# EAGLE board headstage-neuropix (EAGLE 8.3.2), part 1 of 2
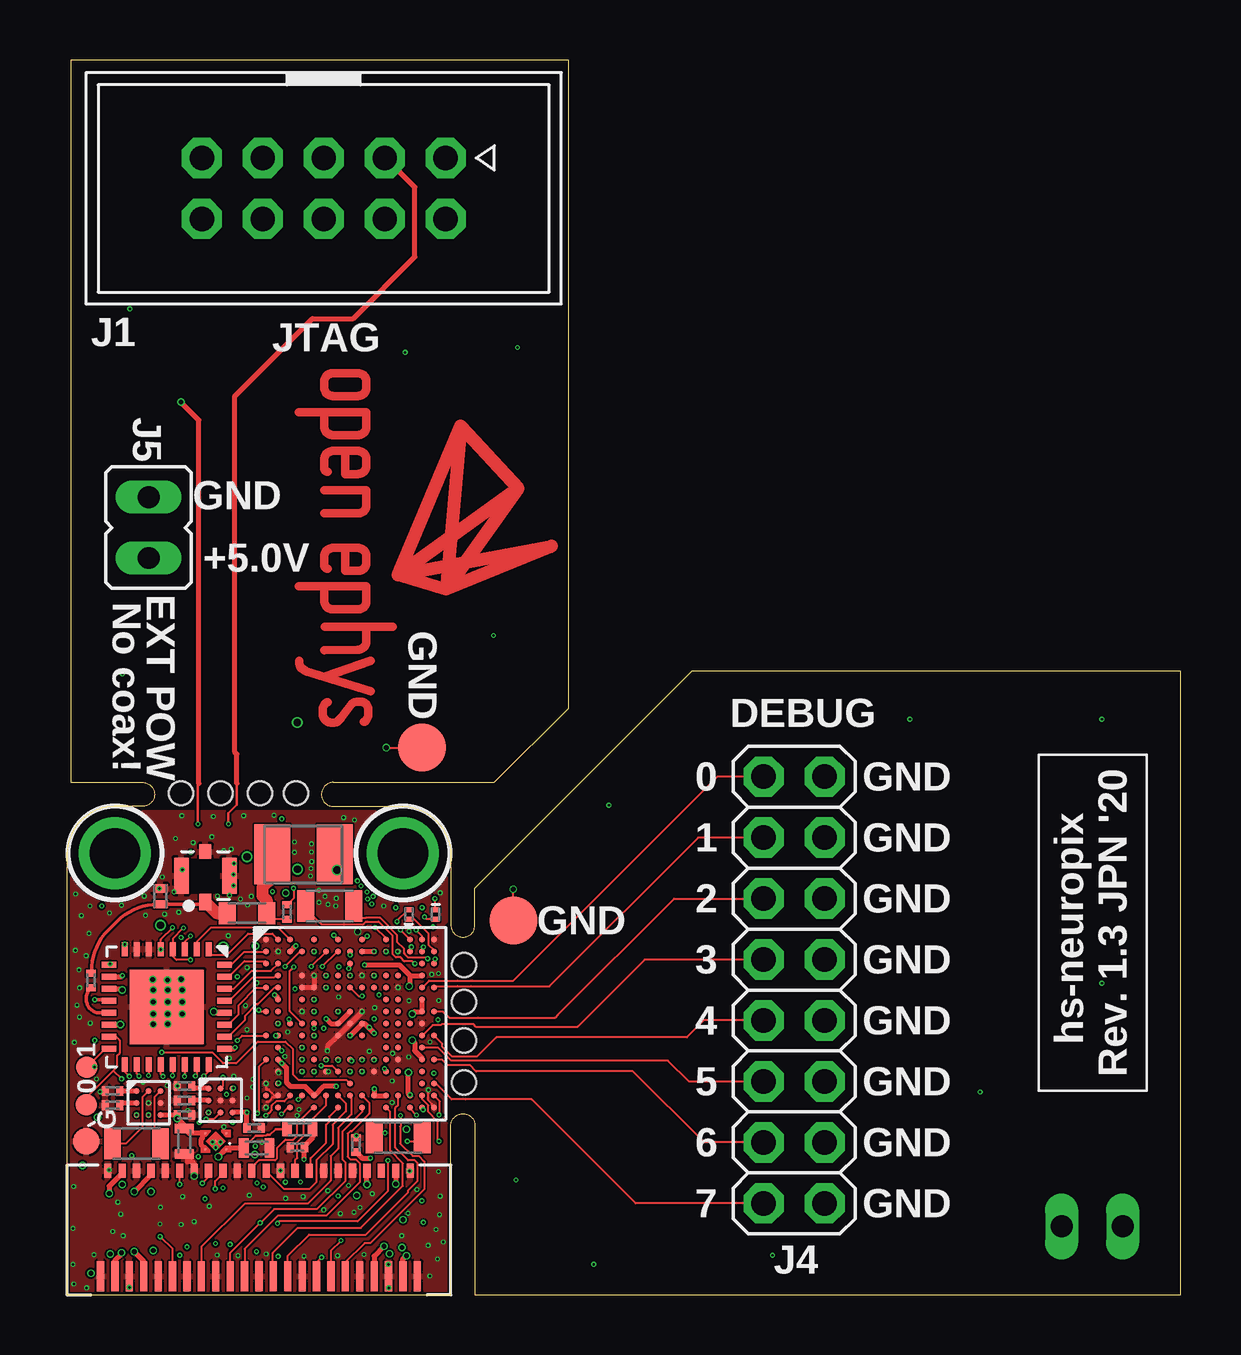
[diagram p0: board, top side]
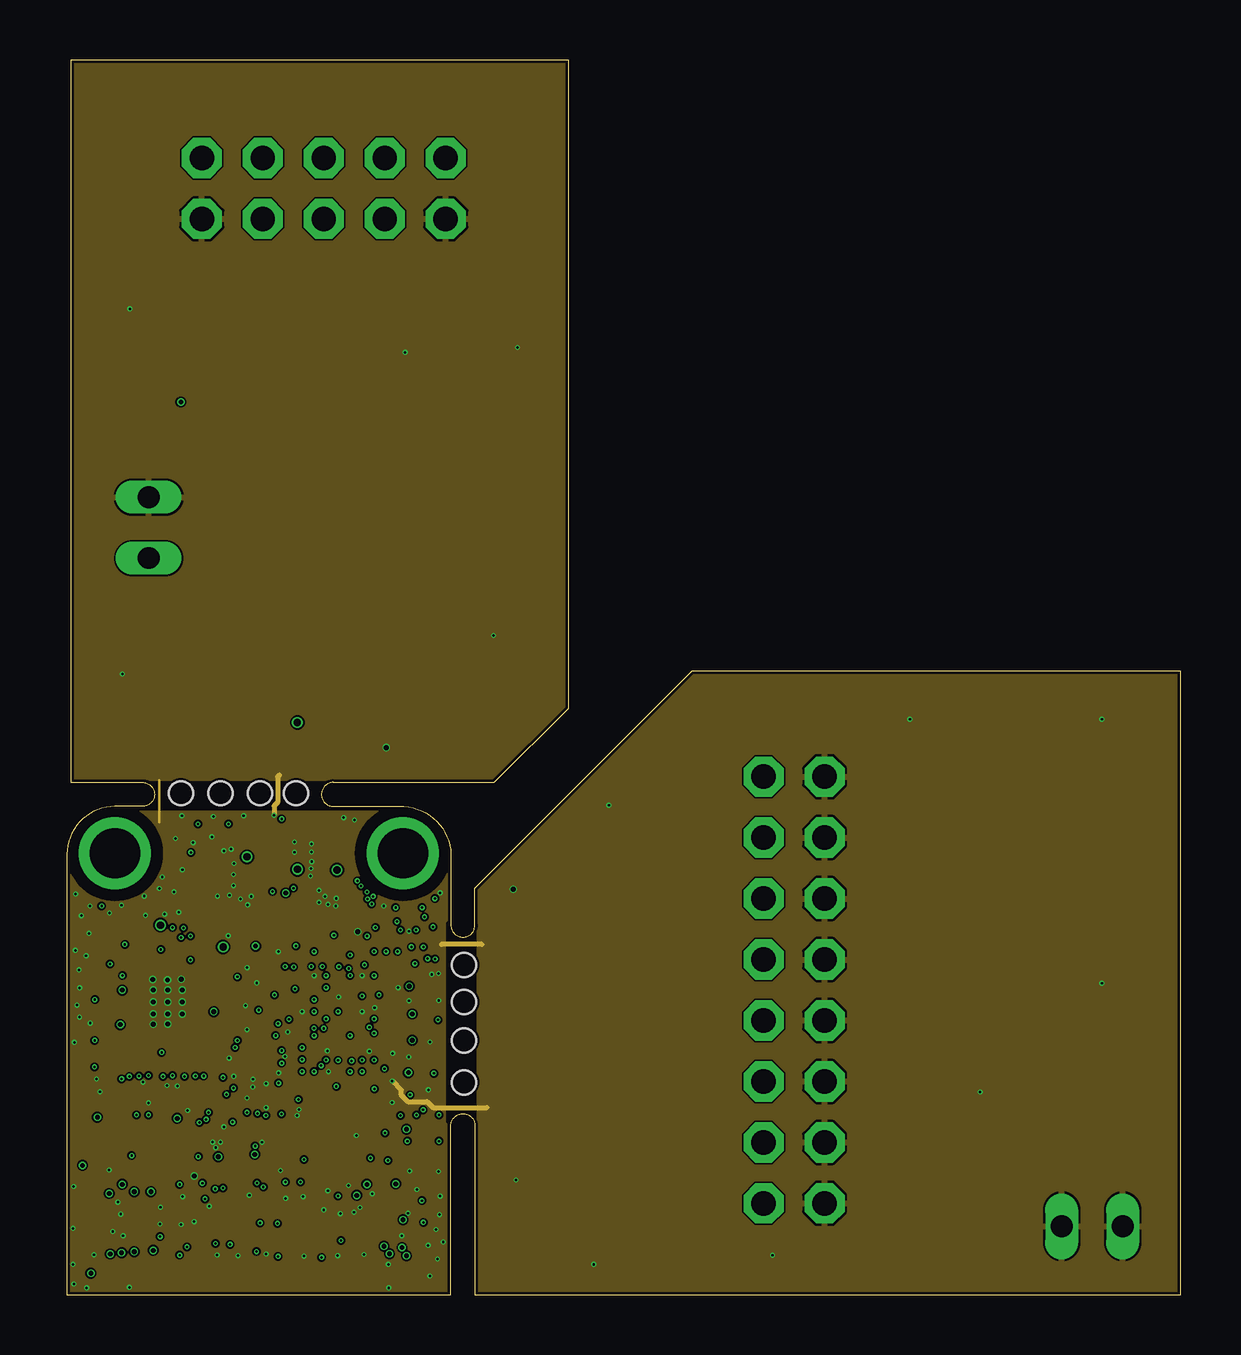
[diagram p1: board, inner layer GND1]
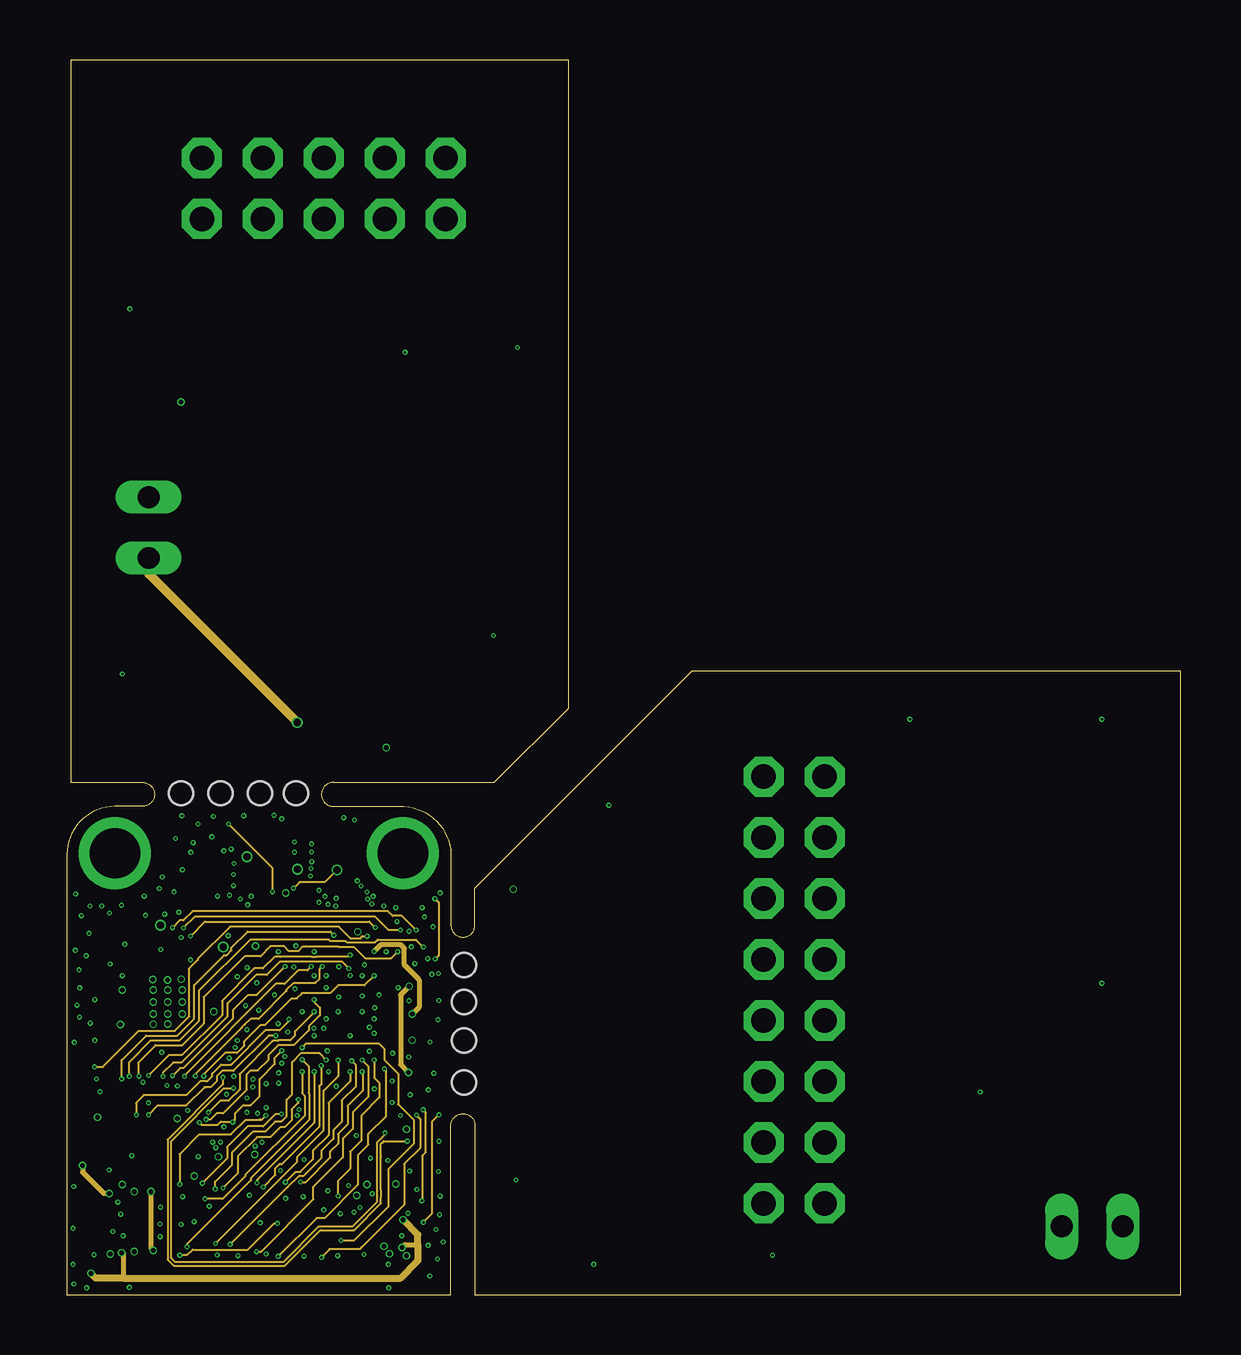
[diagram p2: board, inner layer Highspeed2]
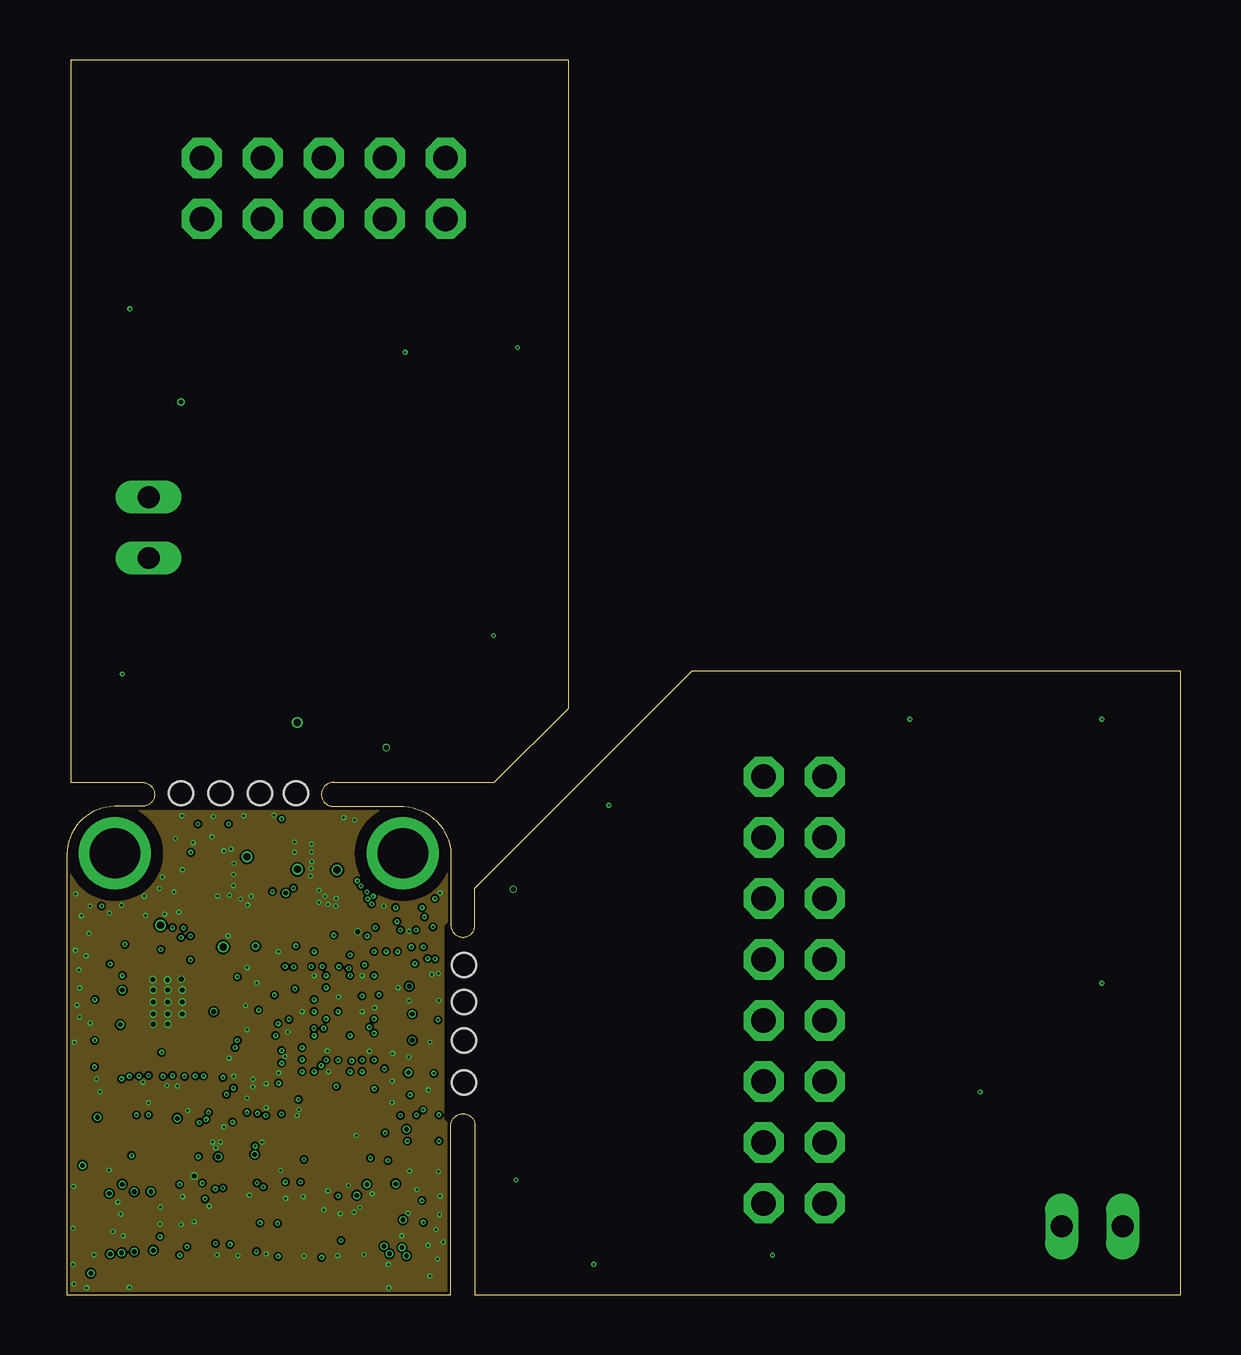
[diagram p3: board, inner layer GND2]
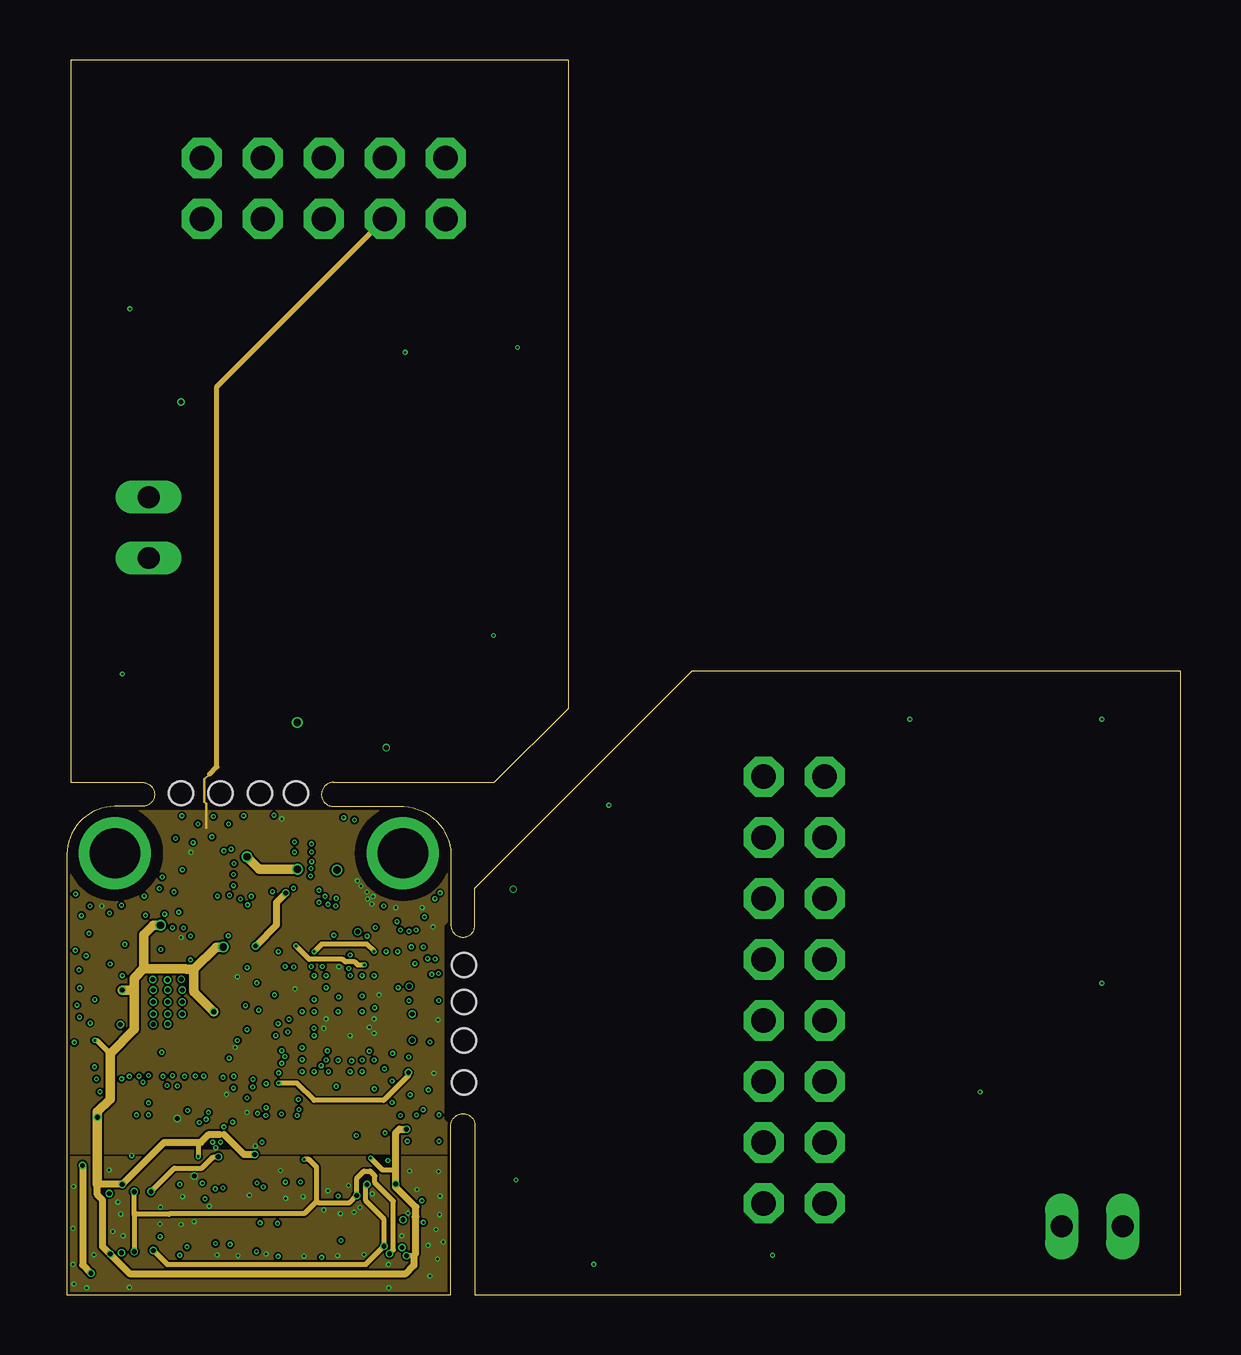
[diagram p4: board, inner layer VCC]
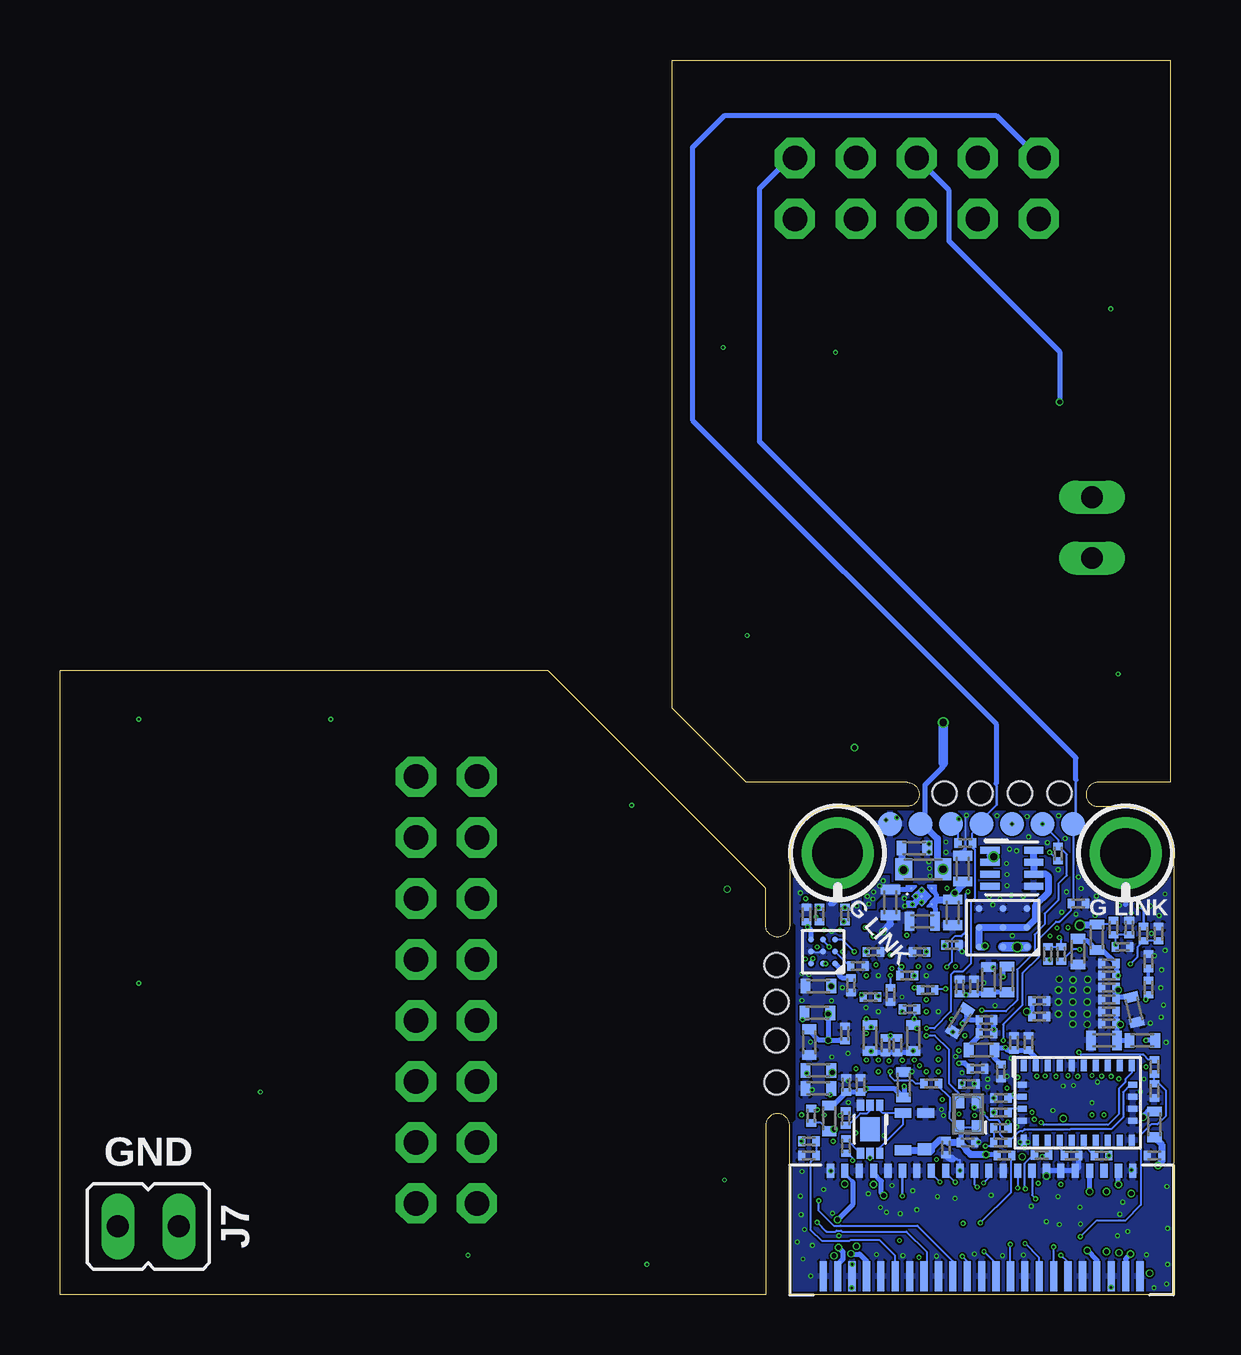
[diagram p5: board, bottom side, seen from below]

Size 46.4 x 51.45 mm. Coordinates in mm from the lower left corner, seen from the top.
Outline: 0.15,51.45 0.15,21.35 3.15,21.35 arc-90 3.65,20.85 arc-90 3.15,20.35 2,20.35 arc90 0,18.35 0,0 16,0 16,7.05 arc-90 16.5,7.55 arc-90 17,7.05 17,0 46.4,0 46.4,26 26.05,26 17,16.95 17,15.4 arc-90 16.5,14.9 arc-90 16,15.4 16,18.35 arc90 13.85,20.35 11.1,20.35 arc-90 10.6,20.85 arc-90 11.1,21.35 17.8,21.35 20.9,24.45 20.9,51.45 0.15,51.45
Copper layers (1*2*3+4*5*16): Highspeed1 0.036mm / dielectric 4mil / GND1 0.036mm / dielectric 5mil / Highspeed2 0.036mm / dielectric 0.10921875mm / GND2 0.036mm / dielectric 5mil / VCC 0.036mm / dielectric 4mil / LowSpeed 0.036mm
Design rules "speedy-6-layer-3mil-trace-space": minimum track width 3mil, minimum drill 3mil, track to track 3mil, track to pad 3mil, pad to pad 3mil, via to via 3mil, smd to smd 2mil, copper to edge 5mil, drill to drill 5mil, minimum pad ring 2mil, minimum via ring 2mil, stop-mask expansion 1mil, vias tented up to drill 1mm, thermal gap 0.1mm
Net classes: 1 diff: width 0.09 mm, drill 0.2 mm, clearance 0.09 mm
Holes 1 mm at 8.05,20.9 16.55,12.2 16.55,10.6 16.55,8.85 16.55,13.75 4.75,20.9 6.4,20.9 9.55,20.9
tKeepout: area 12,16.4 to 16,20.4; area 0,16.4 to 4,20.4
bKeepout: area 11.9,16.3 to 16.1,20.5; area -0.1,16.3 to 4.1,20.5
tRestrict: area -0.1,16.3 to 4.1,20.5; area 11.9,16.3 to 16.1,20.5
bRestrict: area -0.1,16.3 to 4.1,20.5; area 11.9,16.3 to 16.1,20.5
vRestrict: area 11.9,16.3 to 16.1,20.5

## Footprints (pad centres in the part's own frame; a part is rotated, then mirrored left to right if it is on the bottom)
0201T = smd 0.3 x 0.4: 1 -0.3,0; 2 0.3,0
0402T = smd 0.4 x 0.6: 1 -0.533,0; 2 0.533,0
0402TW = smd 0.4 x 0.8: 1 -0.533,0; 2 0.533,0
LED-0201T = smd 0.2 x 0.35: 1 -0.2,0; 2 0.2,0
0402T-DFN = smd 0.35 x 0.6: A -0.325,0; C 0.325,0
0805PT-NOSILK = smd 0.7 x 1.3: A -1,0; C 1,0
2X05_IDC = drill 1.016 pad 1.676 octagon: 1 -5.08,-1.27; 2 -5.08,1.27; 3 -2.54,-1.27; 4 -2.54,1.27; 5 0,-1.27; 6 0,1.27; 7 2.54,-1.27; 8 2.54,1.27; 9 5.08,-1.27; 10 5.08,1.27
X_FL_R_SMT_1(02) = smd 0.5 x 0.7: P$1 0,-1.1 | smd 0.6 x 1.5: P$2 -1,0; P$4 1,0 | smd 0.5 x 0.6: P$3 0,1
FH23-45S-0.3SHW(05) = smd 0.3 x 1.25: 1 -6.6,0.068; 3 -6,0.068; 5 -5.4,0.068; 7 -4.8,0.068; 9 -4.2,0.068; 11 -3.6,0.068; 13 -3,0.068; 15 -2.4,0.068; 17 -1.8,0.068; 19 -1.2,0.068; 21 -0.6,0.068; 23 0,0.068; 25 0.6,0.068; 27 1.2,0.068; 29 1.8,0.068; 31 2.4,0.068; 33 3,0.068; 35 3.6,0.068; 37 4.2,0.068; 39 4.8,0.068; 41 5.4,0.068; 43 6,0.068; 45 6.6,0.068 | smd 0.3 x 0.6: 2 -6.3,4.468; 4 -5.7,4.468; 6 -5.1,4.468; 8 -4.5,4.468; 10 -3.9,4.468; 12 -3.3,4.468; 14 -2.7,4.468; 16 -2.1,4.468; 18 -1.5,4.468; 20 -0.9,4.468; 22 -0.3,4.468; 24 0.3,4.468; 26 0.9,4.468; 28 1.5,4.468; 30 2.1,4.468; 32 2.7,4.468; 34 3.3,4.468; 36 3.9,4.468; 38 4.5,4.468; 40 5.1,4.468; 42 5.7,4.468; 44 6.3,4.468
2X08-BIG = drill 1.016 pad 1.676 octagon: 1 -8.89,-1.17; 2 -8.89,1.37; 3 -6.35,-1.17; 4 -6.35,1.37; 5 -3.81,-1.17; 6 -3.81,1.37; 7 -1.27,-1.17; 8 -1.27,1.37; 9 1.27,-1.17; 10 1.27,1.37; 11 3.81,-1.17; 12 3.81,1.37; 13 6.35,-1.17; 14 6.35,1.37; 15 8.89,-1.17; 16 8.89,1.37
JP2 = drill 0.914 long: 1 0,0; 2 2.54,0
0603T = smd 0.7 x 0.9: 1 -0.82,0; 2 0.82,0
1210T = smd 1.5 x 2.5: 1 -1.3,0; 2 1.3,0
TP10R = smd 1 x 1: TP 0,0
TP11R = smd 1.1 x 1.1: TP 0,0
TP09R = smd 0.9 x 0.9: TP 0,0
TP20R = smd 2 x 2: TP 0,0
MBGA153-8X8 = smd 0.25 x 0.25: A1 -3.5,3.5; A2 -3,3.5; A3 -2.5,3.5; A5 -1.5,3.5; A7 -0.5,3.5; A9 0.5,3.5; A11 1.5,3.5; A13 2.5,3.5; A14 3,3.5; A15 3.5,3.5; B1 -3.5,3; B2 -3,3; B3 -2.5,3; B4 -2,3; B5 -1.5,3; B6 -1,3; B7 -0.5,3; B8 0,3; B9 0.5,3; B10 1,3; B11 1.5,3; B12 2,3; B13 2.5,3; B14 3,3; B15 3.5,3; C1 -3.5,2.5; C2 -3,2.5; C8 0,2.5; C14 3,2.5; C15 3.5,2.5; D2 -3,2; D4 -2,2; D5 -1.5,2; D6 -1,2; D7 -0.5,2; D8 0,2; D9 0.5,2; D10 1,2; D11 1.5,2; D12 2,2; D14 3,2; E1 -3.5,1.5; E2 -3,1.5; E4 -2,1.5; E5 -1.5,1.5; E6 -1,1.5; E7 -0.5,1.5; E8 0,1.5; E9 0.5,1.5; E10 1,1.5; E11 1.5,1.5; E12 2,1.5; E14 3,1.5; E15 3.5,1.5; F2 -3,1; F4 -2,1; F5 -1.5,1; F11 1.5,1; F12 2,1; F14 3,1; G1 -3.5,0.5; G2 -3,0.5; G4 -2,0.5; G5 -1.5,0.5; G7 -0.5,0.5; G8 0,0.5; G9 0.5,0.5; G11 1.5,0.5; G12 2,0.5; G14 3,0.5; G15 3.5,0.5; H2 -3,0; H3 -2.5,0; H4 -2,0; H5 -1.5,0; H7 -0.5,0; H8 0,0; H9 0.5,0; H11 1.5,0; H12 2,0; H13 2.5,0; H14 3,0; J1 -3.5,-0.5; J2 -3,-0.5; J4 -2,-0.5; J5 -1.5,-0.5; J7 -0.5,-0.5; J8 0,-0.5; J9 0.5,-0.5; J11 1.5,-0.5; J12 2,-0.5; J14 3,-0.5; J15 3.5,-0.5; K2 -3,-1; K4 -2,-1; K5 -1.5,-1; K11 1.5,-1; K12 2,-1; K14 3,-1; L1 -3.5,-1.5; L2 -3,-1.5; L4 -2,-1.5; L5 -1.5,-1.5; L6 -1,-1.5; L7 -0.5,-1.5; L8 0,-1.5; L9 0.5,-1.5; L10 1,-1.5; L11 1.5,-1.5; L12 2,-1.5; L14 3,-1.5; L15 3.5,-1.5; M2 -3,-2; M4 -2,-2; M5 -1.5,-2; M6 -1,-2; M7 -0.5,-2; M8 0,-2; M9 0.5,-2; M10 1,-2; M11 1.5,-2; M12 2,-2; M14 3,-2; N1 -3.5,-2.5; N2 -3,-2.5; N8 0,-2.5; N14 3,-2.5; N15 3.5,-2.5; P1 -3.5,-3; P2 -3,-3; P3 -2.5,-3; P4 -2,-3; P5 -1.5,-3; P6 -1,-3; P7 -0.5,-3; P8 0,-3; P9 0.5,-3; P10 1,-3; P11 1.5,-3; P12 2,-3; P13 2.5,-3; P14 3,-3; P15 3.5,-3; R1 -3.5,-3.5; R2 -3,-3.5; R3 -2.5,-3.5; R5 -1.5,-3.5; R7 -0.5,-3.5; R9 0.5,-3.5; R11 1.5,-3.5; R13 2.5,-3.5; R14 3,-3.5; R15 3.5,-3.5
ASCO = smd 0.6 x 0.5: 1 -0.55,-0.4; 2 0.55,-0.4; 3 0.55,0.4; 4 -0.55,0.4
UDFN8-2X2 = smd 0.8 x 0.3: 1 -0.91,0.75; 2 -0.91,0.25; 3 -0.91,-0.25; 4 -0.91,-0.75; 5 0.91,-0.75; 6 0.91,-0.25; 7 0.91,0.25; 8 0.91,0.75
WQFN32-5X5 = smd 0.25 x 0.6: 1 1.75,2.4; 2 1.25,2.4; 3 0.75,2.4; 4 0.25,2.4; 5 -0.25,2.4; 6 -0.75,2.4; 7 -1.25,2.4; 8 -1.75,2.4; 17 -1.75,-2.4; 18 -1.25,-2.4; 19 -0.75,-2.4; 20 -0.25,-2.4; 21 0.25,-2.4; 22 0.75,-2.4; 23 1.25,-2.4; 24 1.75,-2.4 | smd 0.6 x 0.25: 9 -2.4,1.75; 10 -2.4,1.25; 11 -2.4,0.75; 12 -2.4,0.25; 13 -2.4,-0.25; 14 -2.4,-0.75; 15 -2.4,-1.25; 16 -2.4,-1.75; 25 2.4,-1.75; 26 2.4,-1.25; 27 2.4,-0.75; 28 2.4,-0.25; 29 2.4,0.25; 30 2.4,0.75; 31 2.4,1.25; 32 2.4,1.75 | smd 3.1 x 3.1: PAD 0,0
X2SON = smd 0.1 x 0.1: 1 -0.43,0.33; 2 -0.43,-0.33; 3 0.43,-0.33; 4 0.43,0.33 | smd 0.1 x 0.1 rotated 45: PAD 0,0
MICROSIP9-3X2.3 = smd 0.3 x 0.3: A1 -1,0.8; A2 0,0.8; A3 1,0.8; B1 -1,0; B2 0,0; B3 1,0; C1 -1,-0.8; C2 0,-0.8; C3 1,-0.8
LGA-28-3.8X5.2 = smd 0.25 x 0.475: 1 -2.25,1.56; 6 -2.25,-1.56; 7 -1.75,-1.56; 8 -1.25,-1.56; 9 -0.75,-1.56; 10 -0.25,-1.56; 11 0.25,-1.56; 12 0.75,-1.56; 13 1.25,-1.56; 14 1.75,-1.56; 15 2.25,-1.56; 20 2.25,1.56; 21 1.75,1.56; 22 1.25,1.56; 23 0.75,1.56; 24 0.25,1.56; 25 -0.25,1.56; 26 -0.75,1.56; 27 -1.25,1.56; 28 -1.75,1.56 | smd 0.375 x 0.25: 2 -2.3,0.75; 3 -2.3,0.25; 4 -2.3,-0.25; 5 -2.3,-0.75; 16 2.3,-0.75; 17 2.3,-0.25; 18 2.3,0.25; 19 2.3,0.75
VFLGA4-2.0X1.6 = smd 0.5 x 0.57: 1 -0.725,-0.425 | smd 0.4 x 0.7: 2 0.775,-0.475; 3 0.775,0.475; 4 -0.775,0.475
DFN6_2X1.3_PAD = smd 0.45 x 0.3: 1 -1,0.4; 2 -1,0; 3 -1,-0.4; 4 1,-0.4; 5 1,0; 6 1,0.4 | smd 1 x 0.8: PAD 0,0
WLCSP3X3 = smd 0.25 x 0.25: A1 -0.5,0.5; A2 0,0.5; A3 0.5,0.5; B1 -0.5,0; B2 0,0; B3 0.5,0; C1 -0.5,-0.5; C2 0,-0.5; C3 0.5,-0.5

## Placement (x,y rotation side)
C1  22nF  [0201T]  9.24,14.58 0 bottom
C2  22nF  [0201T]  11.5,10.4 270 bottom
C3  0.1uF  [0201T]  8.53,8.78 0 bottom
C4  0.1uF  [0201T]  12,10.4 270 bottom
C5  4.7uF  [0402T]  14.8,12.86 180 bottom
C6  4.7uF  [0402T]  12.65,10.7 270 bottom
C7  10uF  [0402T]  14.8,8.6 180 bottom
C8  10uF  [0402T]  10.85,10.7 270 bottom
C9  22nF  [0201T]  8.17,9.42 0 bottom
C10  22nF  [0201T]  13.7,10.89 90 bottom
C11  10nF  [0201T]  8.58,6.34 180 bottom
C12  22nF  [0201T]  8.32,12.85 90 bottom
C13  22nF  [0201T]  7.8,11.45 0 bottom
C14  22nF  [0201T]  13.64,8.75 90 bottom
C15  22nF  [0201T]  12.51,14.29 0 bottom
C16  0.1uF  [0201T]  8.91,12.84 90 bottom
C17  0.1uF  [0201T]  7.8,10.9 0 bottom
C18  0.1uF  [0201T]  13.05,8.75 90 bottom
C19  0.1uF  [0201T]  10.58,14.29 180 bottom
C20  10uF  [0402T]  8.9,11.42 238.2 bottom
C21  10uF  [0402T]  11.25,8.75 90 bottom
C22  10uF  [0402T]  15.18,10.53 270 bottom
C23  10uF  [0402T]  7.71,13.13 90 bottom
C24  0.1uF  [0201T]  7.2,8.2 180 bottom
C25  10uF  [0402TW]  9.2,15.93 270 bottom
C26  0.1uF  [0201T]  6.05,10.5 90 bottom
C27  10uF  [0402TW]  8.78,17.76 90 bottom
C28  0.1uF  [0201T]  5.6,12.25 0 bottom
C29  0.1uF  [0201T]  7.2,9.3 270 bottom
C30  10nF  [0201T]  5.6,11.6 0 bottom
C31  10nF  [0201T]  6.65,10.5 90 bottom
C32  10uF  [0402TW]  10.47,15.56 180 bottom
C33  10uF  [0402TW]  4.89,6.4 270 top
C34  0.1uF  [0201T]  4.25,5.8 180 bottom
C35  10nF  [0201T]  2.7,13.8 180 bottom
C36  10nF  [0201T]  2.7,12.8 180 bottom
C37  10nF  [0201T]  2.7,11.8 180 bottom
C38  0.1uF  [0201T]  2.7,13.3 180 bottom
C39  0.1uF  [0201T]  2.7,12.3 180 bottom
C40  0.1uF  [0201T]  2.7,11.3 180 bottom
C41  10uF  [0402TW]  11.8,16.35 270 bottom
C42  10uF  [0402TW]  7.9,6.12 0 top
C43  0.1uF  [0201T]  1,13.1 270 top
C44  47nF  [0201T]  1.05,12.8 270 bottom
C45  4.7uF  [0402T]  3.98,14.3 270 bottom
C46  10uF  [0402T]  1.65,11.88 283 bottom
C47  10uF  [0402TW]  2.9,10.6 180 bottom
C48  1uF  [0201T]  0.63,15.05 90 bottom
C49  10nF  [0201T]  9.48,6.13 90 bottom
C50  0.1uF  [0201T]  2.13,14.5 0 bottom
C51  10uF  [0402T]  10.8,18.61 0 bottom
C52  10nF  [0201T]  12.05,6.25 270 top
C53  1uF  [0201T]  1.9,8.5 180 top
C54  1uF  [0201T]  4.9,8.7 180 top
C55  1uF  [0201T]  13.45,12.9 270 bottom
C56  0.1uF  [0201T]  9.6,6.15 180 top
C57  0.1uF  [0201T]  4.9,7.5 0 top
C58  0.1uF  [0201T]  7.8,6.95 0 top
C59  0.1uF  [0201T]  15.3,15.85 90 bottom
C60  0.1uF  [0201T]  0.8,5.8 180 bottom
D1  XZVGR155W  [LED-0201T]  15.35,15.85 270 top
D2  XZVGR155W  [LED-0201T]  14.25,15.85 90 top
D3  SESD0402X1UN-0020-090  [0402T-DFN]  3.89,16.6 270 top
D4  VEMD1160X01  [0805PT-NOSILK]  2.9,6.3 0 top
D5  VEMD1160X01  [0805PT-NOSILK]  13.8,6.55 180 top
D6  VEMD1160X01  [0805PT-NOSILK]  10.95,16.2 0 top
J1  302-S101  [2X05_IDC]  10.7,46.1 180 top
J2  X.FL-R-SMT-1(02)  [X_FL_R_SMT_1(02)]  5.77,17.47 0 top
J3  FH23-45S-0.3SHW(05)  [FH23-45S-0.3SHW(05)]  8,0.7 0 top
J4  68602-116HLF  [2X08-BIG]  30.2,12.7 270 top
J5  77311-118-02LF  [JP2]  3.4,30.7 90 top
J6  FH23-45S-0.3SHW(05)  [FH23-45S-0.3SHW(05)]  8,0.7 0 bottom
J7  77311-118-02LF  [JP2]  41.45,2.85 180 bottom
L1  BLM15PX601SN1D  [0402T]  14.8,9.35 0 bottom
L2  BLM15PX601SN1D  [0402T]  6.95,13.14 270 bottom
L3  BLM15PX601SN1D  [0402T]  8,10.2 180 bottom
L4  BLM15PX601SN1D  [0402T]  14.35,7.35 90 bottom
L5  BLM15PX601SN1D  [0402T]  14.84,11.75 0 bottom
L6  BLM15PX601SN1D  [0402T]  3.2,14.9 270 bottom
L7  BLM15PX601SN1D  [0402T]  1.3,10.6 180 bottom
L8  BLM18KG601SN1D  [0603T]  10.43,17.73 0 bottom
L9  ADL3225V-470MT-TL000  [1210T]  9.85,18.35 0 top
L10  MPZ1608S102ATA00  [0603T]  7.5,15.9 0 top
L11  BLM15PX601SN1D  [0402T]  9.7,6.9 180 top
L12  BLM15PX601SN1D  [0402T]  0.8,7.1 90 bottom
R1  4.7k  [0201T]  7.2,6.35 180 bottom
R2  4.7k  [0201T]  7.2,6.95 180 bottom
R3  2k  [0201T]  14.75,15.85 270 bottom
R4  4.7k  [0201T]  10.1,8.8 0 bottom
R5  10k  [0201T]  11,11.9 180 bottom
R6  2k  [0201T]  13.7,15.85 270 bottom
R7  4.7k  [0201T]  15.1,7.46 270 bottom
R8  10k  [0201T]  4.81,18.38 90 bottom
R9  1k  [0201T]  3.97,16.3 0 bottom
R10  4.7k  [0201T]  5.5,5.82 0 bottom
R11  4.7k  [0201T]  5.24,14.2 90 bottom
R12  10k  [0201T]  11.8,12.5 270 bottom
R13  10k  [0201T]  8.68,18.83 0 bottom
R14  4.7k  [0201T]  7.05,5.8 180 bottom
R15  4.7k  [0201T]  4.68,14.2 90 bottom
R16  10k  [0201T]  12.63,12.41 0 bottom
R17  10k  [0201T]  11.1,13.3 0 bottom
R18  10k  [0201T]  10.25,12.7 180 bottom
R19  10k  [0201T]  3,5.8 0 bottom
R20  10k  [0201T]  1.25,15.05 270 bottom
R21  49.9  [0201T]  1.05,13.9 270 bottom
R22  10k  [0201T]  7.2,7.6 0 bottom
R23  10k  [0201T]  2.5,15.3 270 bottom
R24  100k  [0201T]  1.85,15.3 90 bottom
R25  2k  [0201T]  9.17,15.95 90 top
R26  22  [0201T]  13.65,6.2 270 bottom
R27  22  [0201T]  13.66,7.36 90 bottom
R28  20k  [0201T]  0.8,9.5 270 bottom
R29  100  [0201T]  0.8,8.5 270 bottom
R30  15k  [0201T]  1.9,7.9 0 top
R31  15k  [0201T]  4.9,8.1 0 top
R32  15k  [0201T]  13.15,13.7 180 bottom
R33  20k  [0201T]  15.2,6.4 0 bottom
R34  100  [0201T]  15.2,5.8 180 bottom
TP1  [TP10R]  10.54,19.62 180 bottom
TP2  [TP10R]  5.46,19.62 180 bottom
TP3  [TP10R]  4.19,19.62 180 bottom
TP4  [TP10R]  8,19.62 180 bottom
TP5  [TP10R]  6.73,19.62 180 bottom
TP6  [TP10R]  9.27,19.62 180 bottom
TP7  [TP10R]  11.81,19.62 180 bottom
TP8  [TP11R]  0.81,6.39 0 top
TP10  [TP09R]  0.83,9.49 0 top
TP11  [TP09R]  0.81,7.92 0 top
TP12  [TP20R]  18.6,15.6 0 top
TP13  [TP20R]  14.8,22.8 270 top
U1  10M08SAM15317G  [MBGA153-8X8]  11.8,11.3 0 top
U2  ASCO2-24.000MHZ-EK-T3  [ASCO]  8.57,7.53 90 bottom
U3  MAX4944ELA+T  [UDFN8-2X2]  6.74,17.77 0 bottom
U4  DS90UB933_WQFN  [WQFN32-5X5]  4.16,12 0 top
U5  NCP161BMX330  [X2SON]  10.5,16.6 0 bottom
U6  TPS8268180  [MICROSIP9-3X2.3]  7.11,15.3 180 bottom
U7  TLV70712  [X2SON]  6.2,6.4 180 top
U8  BNO055  [LGA-28-3.8X5.2]  4,8 0 bottom
U9  DSC6102MI2A-093.6000  [VFLGA4-2.0X1.6]  10.8,6.8 90 bottom
U10  PL133-27GC-R  [DFN6_2X1.3_PAD]  12.65,6.9 270 bottom
U11  TS4231  [WLCSP3X3]  3.4,8 0 top
U12  TS4231  [WLCSP3X3]  6.4,8.1 0 top
U13  TS4231  [WLCSP3X3]  14.6,14.3 180 bottom
X2  OE-LOGO_14X10  [OE-LOGO-14X10]  13.4,31.8 270 top

## Library data of the parts
C1-C52 D1-D6 J1-J7 L1-L12 R1-R34 TP1-TP8 TP10-TP13 U1-U13 X2 = jonnew
C53-C55 = jonnew; PARTNO: CL03A105MP3ZSNH
C56-C60 = jonnew; PARTNO: C0603X5R1C104K030BC

## Nets
1V2A: C56.1 J3.7 J3.8 J6.7 J6.8 L11.1
1V8A: C60.1 J3.3 J3.4 J6.3 J6.4 L12.1
24MHZ_P: U1.J5 U2.3
!IMU_BL: R22.2 U8.4
!IMU_RESET: R19.1 U8.11
+1V2: C42.1 J3.38 J3.39 J6.38 J6.39 L11.2 U7.1
+1V8: C11.2 C28.1 C30.1 C36.1 C39.1 C46.1 C49.2 C52.2 J3.42 J3.43 J6.42 J6.43 L4.1 L6.1 L7.1 L12.2 R4.2 R7.2 R10.2 R14.2 R23.1 U2.1 U2.4 U4.11 U4.28 U6.A1 U6.A2 U9.1 U9.4 U10.5
+3V3: C2.1 C4.1 C6.1 C8.1 C24.1 C26.1 C29.1 C31.1 C33.1 C41.1 C57.1 C58.1 C59.1 J1.4 L1.1 L2.1 L3.1 L5.1 R1.2 R2.2 R3.1 R5.1 R6.1 R8.1 R11.2 R13.1 R15.2 R16.1 R17.1 R18.1 R19.2 R20.1 R22.1 TP6.TP U1.G8 U1.H7 U1.H9 U1.J8 U4.25 U5.1 U7.3 U7.4 U8.3 U8.28 U11.C3 U12.C3 U13.C3
BNO_SCL: R1.1 U1.L1 U8.19
BNO_SDA: R2.1 U1.K2 U8.20
CAL_A_1.3KHZ: R28.1 U1.N8
CAL_B_1.3KHZ: R33.1 U1.P14
CAL_SIGNAL_A: J3.11 R28.2 R29.1
CAL_SIGNAL_A1: J6.11 R33.2 R34.1
CONF_DONE: R18.2 U1.E6
CONFIG_SEL: R12.1 U1.D8
DEBUG0: J4.1 U1.E14
DEBUG1: J4.3 U1.E15
DEBUG2: J4.5 U1.G15
DEBUG3: J4.7 U1.J14
DEBUG4: J4.9 U1.J15
DEBUG5: J4.11 U1.K14
DEBUG6: J4.13 U1.L15
DEBUG7: J4.15 U1.N15
GND: C1.2 C2.2 C3.2 C4.2 C5.2 C6.2 C7.2 C8.2 C9.2 C10.2 C11.1 C12.2 C13.2 C14.2 C15.2 C16.2 C17.2 C18.2 C19.2 C20.2 C21.2 C22.2 C23.2 C24.2 C25.2 C26.2 C27.2 C28.2 C29.2 C30.2 C31.2 C32.2 C33.2 C34.1 C35.2 C36.2 C37.2 C38.2 C39.2 C40.2 C41.2 C42.2 C45.2 C46.2 C47.2 C48.2 C49.1 C50.2 C51.2 C52.1 C53.2 C54.2 C55.2 C56.2 C57.2 C58.2 C59.2 C60.2 D3.A J1.2 J1.10 J2.P$2 J2.P$3 J2.P$4 J3.1 J3.2 J3.5 J3.6 J3.9 J3.10 J3.13 J3.14 J3.17 J3.20 J3.23 J3.26 J3.29 J3.32 J3.34 J3.36 J3.37 J3.41 J3.44 J3.45 J4.2 J4.4 J4.6 J4.8 J4.10 J4.12 J4.14 J4.16 J5.2 J6.1 J6.2 J6.5 J6.6 J6.9 J6.10 J6.13 J6.14 J6.17 J6.20 J6.23 J6.26 J6.29 J6.32 J6.34 J6.36 J6.37 J6.41 J6.44 J6.45 J7.1 J7.2 R9.2 R12.2 R21.1 R24.2 R29.2 R30.1 R31.1 R32.1 R34.2 TP7.TP TP8.TP TP12.TP TP13.TP U1.A1 U1.A15 U1.B2 U1.D4 U1.D5 U1.D9 U1.E4 U1.E5 U1.E12 U1.G4 U1.G9 U1.H8 U1.H14 U1.J7 U1.L12 U1.M2 U1.M6 U1.M10 U1.N1 U1.P2 U1.R1 U1.R15 U2.2 U3.5 U4.6 U4.7 U4.PAD U5.2 U5.PAD U6.C1 U6.C2 U6.C3 U7.2 U7.PAD U8.2 U8.5 U8.6 U8.15 U8.16 U8.17 U8.18 U8.25 U9.2 U10.3 U11.B2 U11.B3 U12.B2 U12.B3 U13.B2 U13.B3
I2C_SCL_A: J3.19 R14.1 U1.R9
I2C_SCL_B: J6.19 R7.1 U1.R14
I2C_SDA_A: J3.18 R10.1 U1.L6
I2C_SDA_B: J6.18 R4.1 U1.M8
JTAGEN: R5.2 U1.G7
LH_DATA0: U1.G5 U12.C1
LH_DATA1: U1.H3 U11.C1
LH_DATA2: U1.B11 U13.C1
LH_ENV0: U1.F5 U12.C2
LH_ENV1: U1.J2 U11.C2
LH_ENV2: U1.B13 U13.C2
MIDFILT: L9.1 L10.2 R25.1
N$1: U9.3 U10.1 U10.6
N$2: R26.1 U10.4
N$3: J3.35 R27.2
N$4: C13.1 C17.1 C20.1 L3.2 U1.H2
N$5: J6.35 R26.2
N$6: R27.1 U10.2
N$7: D4.C U11.A3
N$8: D4.A U11.A2
N$9: R30.2 U11.B1
N$12: C53.1 U11.A1
N$13: C51.1 L8.1 L9.2 R25.2
N$14: D5.C U12.A3
N$15: D5.A U12.A2
N$16: R31.2 U12.B1
N$26: D6.C U13.A3
N$27: D6.A U13.A2
N$28: C43.2 U4.13
N$29: R32.2 U13.B1
N$30: C48.1 R20.2 U4.9
N$31: C44.2 U4.12
N$32: C44.1 R21.2
N$33: C50.1 R23.2 R24.1 U4.8
N$34: C35.1 C38.1 C45.1 L6.2 U4.10
N$35: C37.1 C40.1 C47.1 L7.2 U4.14
N$36: C54.1 U12.A1
N$37: C55.1 U13.A1
N$38: C25.1 C27.1 C32.1 U3.6 U3.7 U3.8 U5.3 U5.4 U6.A3 U6.B1 U6.B2 U6.B3
N$67: C34.2 U8.9
N$92: D2.2 R6.2
N$93: D1.2 R3.2
NCONFIG: R16.2 U1.E8
NRST_A: J3.15 U1.P8
NRST_B: J6.15 U1.P15
NSTATUS: R17.2 U1.D6
OSC_PDOWN_N_A: J3.12 U1.P3
OSC_PDOWN_N_B: J6.12 U1.L10
PSB_CLK_A: J3.33 U1.K4
PSB_CLK_B: J6.33 U1.L4
PSB_DATA_0_A: J3.31 U1.R13
PSB_DATA_0_B: J6.31 U1.L7
PSB_DATA_1_A: J3.30 U1.R7
PSB_DATA_1_B: J6.30 U1.M4
PSB_DATA_2_A: J3.28 U1.P6
PSB_DATA_2_B: J6.28 U1.P4
PSB_DATA_3_A: J3.27 U1.P12
PSB_DATA_3_B: J6.27 U1.L8
PSB_DATA_4_A: J3.25 U1.R11
PSB_DATA_4_B: J6.25 U1.L9
PSB_DATA_5_A: J3.24 U1.P7
PSB_DATA_5_B: J6.24 U1.M5
PSB_DATA_6_A: J3.22 U1.R5
PSB_DATA_6_B: J6.22 U1.M7
PSB_SYNC_A: J3.21 U1.P9
PSB_SYNC_B: J6.21 U1.M11
REC_NRST_A: J3.16 U1.R3
REC_NRST_B: J6.16 U1.M9
SER_DIN0: U1.B8 U4.19
SER_DIN1: U1.C8 U4.20
SER_DIN2: U1.B4 U4.21
SER_DIN3: U1.B6 U4.22
SER_DIN4: U1.B7 U4.23
SER_DIN5: U1.D10 U4.24
SER_DIN6: U1.E2 U4.26
SER_DIN7: U1.E1 U4.27
SER_DIN8: U1.D2 U4.29
SER_DIN9: U1.C2 U4.30
SER_DIN10: U1.C1 U4.31
SER_DIN11: U1.B1 U4.32
SER_GPIO0: TP11.TP U1.A7 U4.15
SER_GPIO1: TP10.TP U1.A9 U4.16
SER_GPIO2: U1.B14 U4.17
SER_GPIO3: U1.B12 U4.18
SER_HSYNC: U1.A2 U4.1
SER_PCLK: U1.A11 U4.3
SER_SCL: R11.1 U1.A13 U4.4
SER_SDA: R15.1 U1.A14 U4.5
SER_VSYNC: U1.A3 U4.2
SIGOUT: C43.1 D3.C J2.P$1 L10.1
STATUS_A: D1.1 U1.C15
STATUS_B: D2.1 U1.B15
TCK: J1.1 R9.1 TP3.TP U1.J1
TDI: J1.9 R13.2 TP4.TP U1.H5
TDO: J1.3 TP5.TP U1.H4
TMS: J1.5 R8.2 TP2.TP U1.G1
VCCA: C1.1 C3.1 C5.1 C7.1 L1.2 U1.B3 U1.D14 U1.N2 U1.P13
VCCIO: C10.1 C15.1 C19.1 C22.1 L5.2 U1.B5 U1.B9 U1.B10 U1.F14 U1.G14 U1.L14
VCCIO2: C9.1 C14.1 C18.1 C21.1 L4.2 U1.L2 U1.P5 U1.P10 U1.P11
VCCIOA: C12.1 C16.1 C23.1 L2.2 U1.F2
VCOAX: J5.1 L8.2 TP1.TP U3.1 U3.2